# EAGLE board Sensor Board@cc5a5f78792f40558ec8fd108debedc7 (EAGLE 6.4)
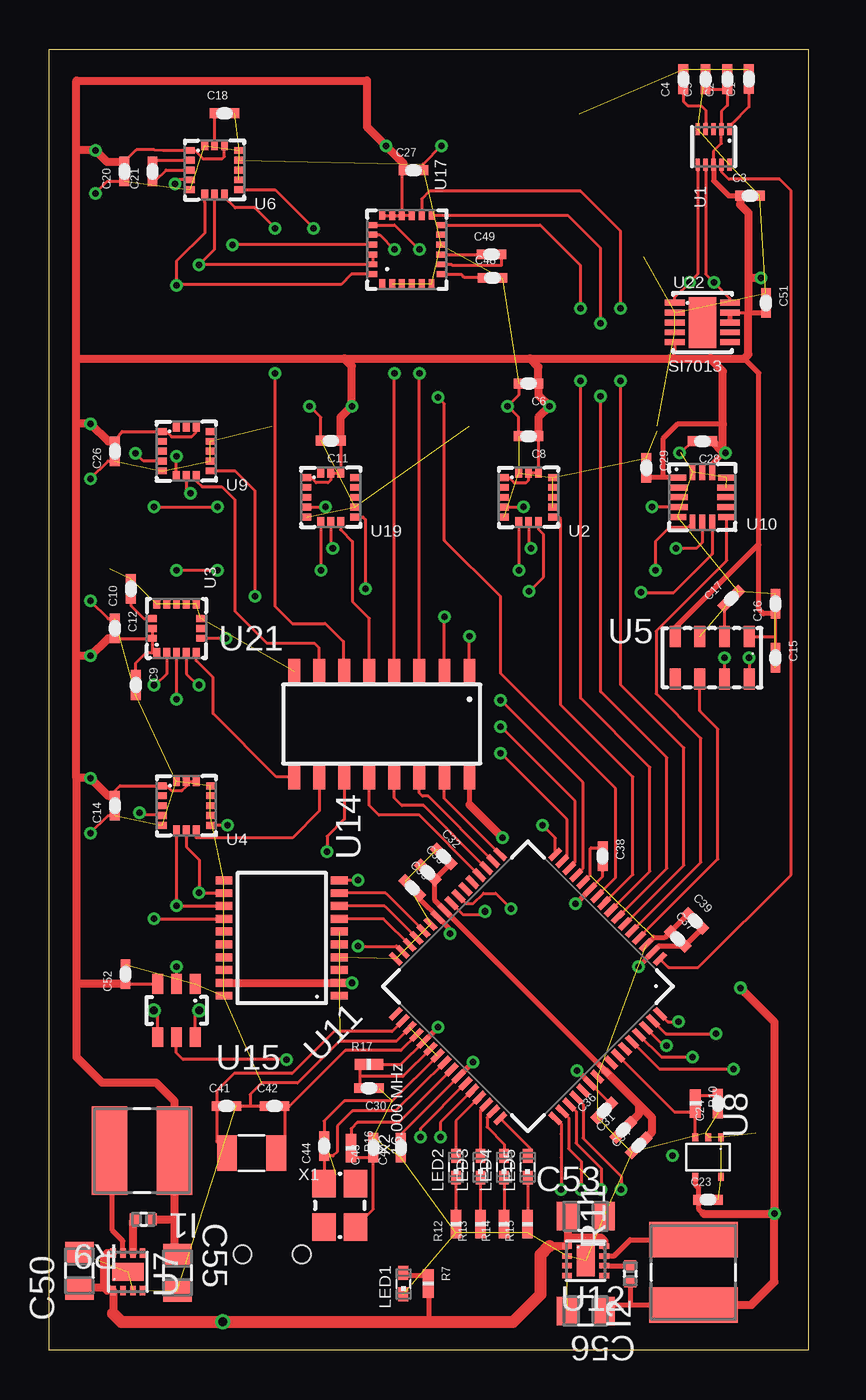
[diagram p0: board, top side]
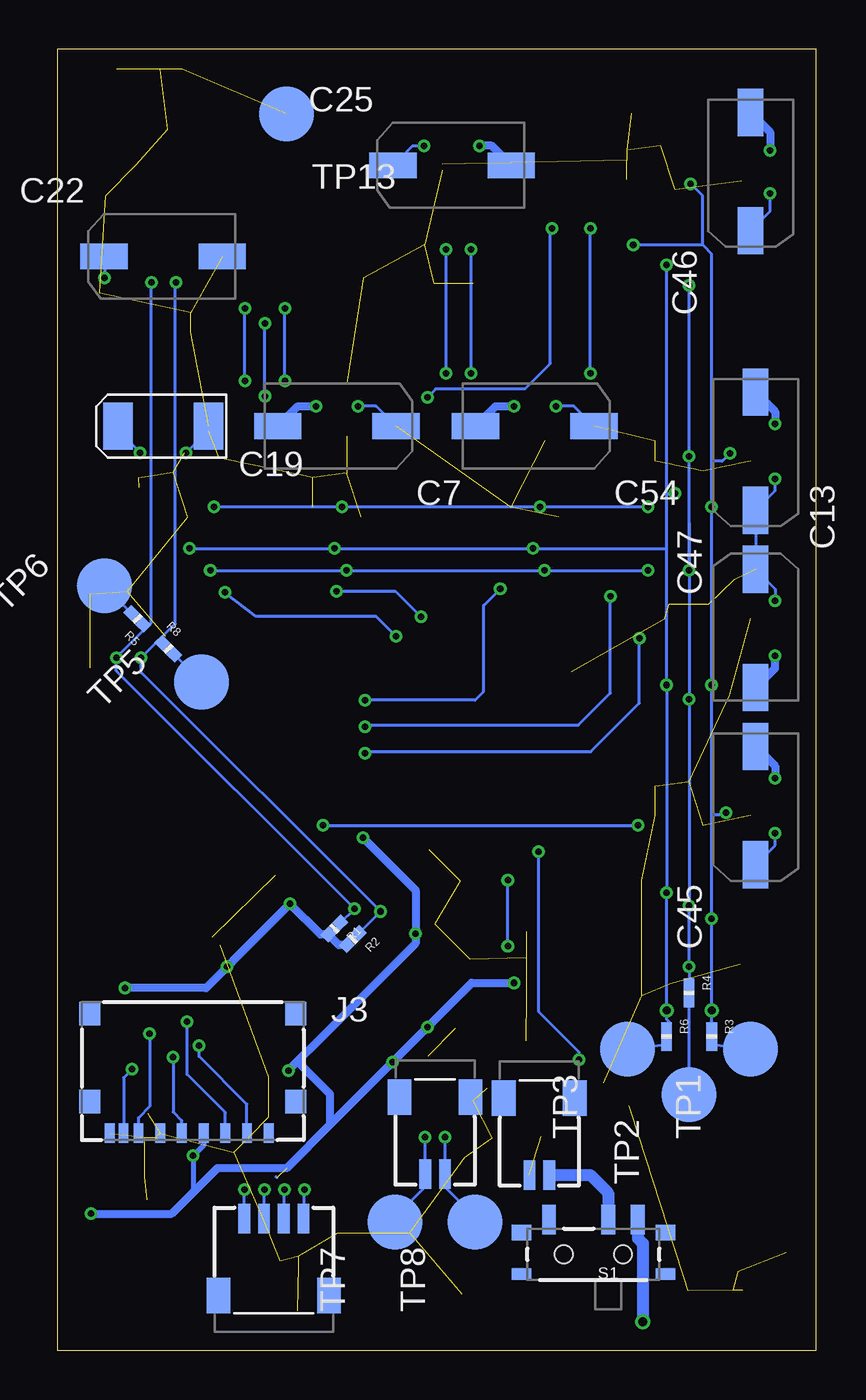
[diagram p1: board, bottom side, seen from below]

Size 38.5 x 66 mm. Coordinates in mm from the lower left corner, seen from the top.
Outline: 38.5,0 0,0 0,66 38.5,66 38.5,0
Copper layers (1*2*15*16): Top 0.035mm / dielectric 0.2mm / Route2 0.0175mm / dielectric 1.1mm / Route15 0.0175mm / dielectric 0.2mm / Bottom 0.035mm
Design rules "SeeedStudio_DRU_no_angle_20130527": minimum track width 6mil, minimum drill 12mil, track to track 6mil, track to pad 6mil, pad to pad 6mil, via to via 6mil, smd to smd 0mil, copper to edge 10mil, drill to drill 10mil, minimum pad ring 6mil, minimum via ring 6mil, stop-mask expansion 2mil, vias tented up to drill 25mil, thermal gap 10mil

## Footprints (pad centres in the part's own frame; a part is rotated, then mirrored left to right if it is on the bottom)
C0402 = smd 0.5 x 0.5: 1 -0.5,0; 2 0.5,0
4.3X7.3SMD = smd 2.4 x 1.3: P$1 -3,0; P$2 3,0
EIA6032 = smd 1.5 x 2.4: P$1 -2.3,0; P$2 2.3,0
0805 = smd 1.118 x 1.448: 1 -0.914,0; 2 0.914,0
SDR0403 = smd 1.803 x 4.496: 1 -1.651,0; 2 1.651,0
501568-0207 = smd 0.6 x 1.5: P$1 -0.5,3.9; P$2 0.5,3.9 | smd 1.2 x 1.8: P$5 -1.8,0; P$6 1.8,0
SD-105027-1001 = smd 0.5 x 1: P$1 3.85,-6.66; P$2 2.75,-6.66; P$3 1.65,-6.66; P$4 0.55,-6.66; P$5 -0.55,-6.66; P$6 -1.65,-6.66; P$7 -2.75,-6.66; P$8 -3.51,-6.66; P$9 -4.21,-6.66 | smd 1.05 x 1.2: P$10 -5.225,-0.6; P$11 -5.225,-5.05; P$12 5.225,-5.05; P$13 5.225,-0.6
501568-0407 = smd 0.6 x 1.5: P$1 -1.5,3.9; P$2 -0.5,3.9; P$3 0.5,3.9; P$4 1.5,3.9 | smd 1.2 x 1.8: P$5 -2.8,0; P$6 2.8,0
LED_0402 = smd 0.7 x 0.5: A 0.55,0; C -0.55,0
R0402 = smd 0.6 x 0.55: 1 -0.425,0; 2 0.425,0
0402 = smd 0.559 x 0.61: 1 -0.406,0; 2 0.406,0
SWITCH-SPST-SMD-A = smd 0.7 x 1.5: 1 -2.25,-1.75; 2 -0.75,-1.75; 3 2.25,-1.75 | smd 1 x 0.6: GND1 -3.65,1; GND3 3.65,1 | smd 1 x 0.8: GND2 -3.65,-1.1; GND4 3.65,-1.1 | hole 0.9: -1.5,0; 1.5,0
TESTPAD(ROUND) = smd 2.794 x 2.794: P$1 0,0
DFN-10(2X2) = smd 0.6 x 0.225: P$1 -0.9,0.8; P$2 -0.9,0.4; P$3 -0.9,0; P$4 -0.9,-0.4; P$5 -0.9,-0.8; P$6 0.9,-0.8; P$7 0.9,-0.4; P$8 0.9,0; P$9 0.9,0.4; P$10 0.9,0.8
LGA-16(3X3) = smd 0.45 x 0.345: P$1 -1.225,1; P$2 -1.225,0.5; P$3 -1.225,0; P$4 -1.225,-0.5; P$5 -1.225,-1; P$9 1.225,-1; P$10 1.225,-0.5; P$11 1.225,0; P$12 1.225,0.5; P$13 1.225,1 | smd 0.345 x 0.45: P$6 -0.5,-1.225; P$7 0,-1.225; P$8 0.5,-1.225; P$14 0.5,1.225; P$15 0,1.225; P$16 -0.5,1.225
LGA-8(5X3) = smd 0.55 x 1.05: P$1 -1.875,-1.075; P$2 -0.625,-1.075; P$3 0.625,-1.075; P$4 1.875,-1.075; P$5 1.875,1.075; P$6 0.625,1.075; P$7 -0.625,1.075; P$8 -1.875,1.075
S-PWSON-N8 = smd 0.5 x 0.28: 1 -0.95,0.75; 2 -0.95,0.25; 3 -0.95,-0.25; 4 -0.95,-0.75; 5 0.95,-0.75; 6 0.95,-0.25; 7 0.95,0.25; 8 0.95,0.75 | smd 0.9 x 1.6: 9 0,0
SOT323-5L = smd 0.4 x 0.3: P$1 1,-0.65; P$2 1,0; P$3 1,0.65; P$4 -1,0.65; P$5 -1,-0.65
LGA-16(3X3.25) = smd 0.865 x 0.3: P$1 -1.242,1; P$5 -1.242,-1; P$9 1.242,-1; P$13 1.242,1 | smd 0.925 x 0.3: P$2 -1.212,0.5; P$3 -1.212,0; P$4 -1.212,-0.5; P$10 1.212,-0.5; P$11 1.212,0; P$12 1.212,0.5 | smd 0.3 x 0.8: P$6 -0.5,-1.275; P$7 0,-1.275; P$8 0.5,-1.275; P$14 0.5,1.275; P$15 0,1.275; P$16 -0.5,1.275
S-PQFP-G64 = smd 0.75 x 0.27: P$1 -5.725,3.75; P$2 -5.725,3.25; P$3 -5.725,2.75; P$4 -5.725,2.25; P$5 -5.725,1.75; P$6 -5.725,1.25; P$7 -5.725,0.75; P$8 -5.725,0.25; P$9 -5.725,-0.25; P$10 -5.725,-0.75; P$11 -5.725,-1.25; P$12 -5.725,-1.75; P$13 -5.725,-2.25; P$14 -5.725,-2.75; P$15 -5.725,-3.25; P$16 -5.725,-3.75; P$33 5.725,-3.75; P$34 5.725,-3.25; P$35 5.725,-2.75; P$36 5.725,-2.25; P$37 5.725,-1.75; P$38 5.725,-1.25; P$39 5.725,-0.75; P$40 5.725,-0.25; P$41 5.725,0.25; P$42 5.725,0.75; P$43 5.725,1.25; P$44 5.725,1.75; P$45 5.725,2.25; P$46 5.725,2.75; P$47 5.725,3.25; P$48 5.725,3.75 | smd 0.27 x 0.75: P$17 -3.75,-5.725; P$18 -3.25,-5.725; P$19 -2.75,-5.725; P$20 -2.25,-5.725; P$21 -1.75,-5.725; P$22 -1.25,-5.725; P$23 -0.75,-5.725; P$24 -0.25,-5.725; P$25 0.25,-5.725; P$26 0.75,-5.725; P$27 1.25,-5.725; P$28 1.75,-5.725; P$29 2.25,-5.725; P$30 2.75,-5.725; P$31 3.25,-5.725; P$32 3.75,-5.725; P$49 3.75,5.725; P$50 3.25,5.725; P$51 2.75,5.725; P$52 2.25,5.725; P$53 1.75,5.725; P$54 1.25,5.725; P$55 0.75,5.725; P$56 0.25,5.725; P$57 -0.25,5.725; P$58 -0.75,5.725; P$59 -1.25,5.725; P$60 -1.75,5.725; P$61 -2.25,5.725; P$62 -2.75,5.725; P$63 -3.25,5.725; P$64 -3.75,5.725
TSSOP-(PW)-20 = smd 0.4 x 0.85: P$1 -2.925,-2.925; P$2 -2.275,-2.925; P$3 -1.625,-2.925; P$4 -0.975,-2.925; P$5 -0.325,-2.925; P$6 0.325,-2.925; P$7 0.975,-2.925; P$8 1.625,-2.925; P$9 2.275,-2.925; P$10 2.925,-2.925; P$11 2.925,2.925; P$12 2.275,2.925; P$13 1.625,2.925; P$14 0.975,2.925; P$15 0.325,2.925; P$16 -0.325,2.925; P$17 -0.975,2.925; P$18 -1.625,2.925; P$19 -2.275,2.925; P$20 -2.925,2.925
SOT23-6 = smd 0.55 x 1: P$1 0.95,1.35; P$2 0,1.35; P$3 -0.95,1.35; P$4 -0.95,-1.35; P$5 0,-1.35; P$6 0.95,-1.35
LGA-24(4X4) = smd 0.432 x 0.3: P$1 -1.725,1.25; P$6 -1.725,-1.25; P$13 1.725,-1.25; P$18 1.725,1.25 | smd 0.45 x 0.3: P$2 -1.725,0.75; P$3 -1.725,0.25; P$4 -1.725,-0.25; P$5 -1.725,-0.75; P$14 1.725,-0.75; P$15 1.725,-0.25; P$16 1.725,0.25; P$17 1.725,0.75 | smd 0.3 x 0.432: P$7 -1.25,-1.725; P$12 1.25,-1.725; P$19 1.25,1.725; P$24 -1.25,1.725 | smd 0.3 x 0.45: P$8 -0.75,-1.725; P$9 -0.25,-1.725; P$10 0.25,-1.725; P$11 0.75,-1.725; P$20 0.75,1.725; P$21 0.25,1.725; P$22 -0.25,1.725; P$23 -0.75,1.725
SOIC-16 = smd 0.6 x 1.27: P$1 -4.445,-2.675; P$2 -3.175,-2.675; P$3 -1.905,-2.675; P$4 -0.635,-2.675; P$5 0.635,-2.675; P$6 1.905,-2.675; P$7 3.175,-2.675; P$8 4.445,-2.675; P$9 4.445,2.675; P$10 3.175,2.675; P$11 1.905,2.675; P$12 0.635,2.675; P$13 -0.635,2.675; P$14 -1.905,2.675; P$15 -3.175,2.675; P$16 -4.445,2.675
DFN-10(3X3) = smd 1 x 0.3: P$1 -1.4,1; P$2 -1.4,0.5; P$3 -1.4,0; P$4 -1.4,-0.5; P$5 -1.4,-1; P$6 1.4,-1; P$7 1.4,-0.5; P$8 1.4,0; P$9 1.4,0.5; P$10 1.4,1 | smd 1.4 x 2.6: P$11 0,0
2-SMD(3.2X1.5) = smd 1 x 1.8: P$1 -1.25,0; P$2 1.25,0
4-SMD(3.2X2.5) = smd 1.4 x 1.2: P$1 -1.1,-0.8; P$2 1.1,-0.8; P$3 1.1,0.8; P$4 -1.1,0.8

## Placement (x,y rotation side)
C1  100nF  [C0402]  35.48,64.49 90 top
C2  1uF  [C0402]  34.39,64.48 90 top
C3  100nF  [C0402]  35.53,58.56 0 top
C4  100nF  [C0402]  32.16,64.48 90 top
C5  100nF  [C0402]  33.28,64.48 90 top
C6  0.1uF  [C0402]  24.31,49.04 180 top
C7  10uF  [4.3X7.3SMD]  24.31,46.88 0 bottom
C8  100nF  [C0402]  24.31,46.37 180 top
C9  100nF  [C0402]  4.39,33.75 270 top
C10  10nF  [C0402]  4.14,38.62 90 top
C11  1uF  [C0402]  14.27,46.14 180 top
C12  10uF  [C0402]  3.33,36.62 270 top
C13  100nF  [4.3X7.3SMD]  3.07,36.62 90 bottom
C14  100nF  [C0402]  3.33,27.63 90 top
C15  100nF  [C0402]  36.83,35.12 270 top
C16  10uF  [C0402]  36.83,37.86 90 top
C17  100nF  [C0402]  34.59,38.14 45 top
C18  4.7uF  [C0402]  8.89,62.76 0 top
C19  1uF  [EIA6032]  33.12,46.88 0 bottom
C20  100nF  [C0402]  3.81,59.8 90 top
C21  0.22uF  [C0402]  5.23,59.8 90 top
C22  10uF  [4.3X7.3SMD]  33.12,55.49 180 bottom
C23  0.1uF  [C0402]  33.42,7.64 0 top
C24  1uF  [C0402]  33.9,12.51 90 top
C25  10uF  [4.3X7.3SMD]  18.46,60.11 180 bottom
C26  100nF  [C0402]  3.33,45.61 90 top
C27  100nF  [C0402]  18.46,59.86 0 top
C28  0.1uF  [C0402]  33.12,46.12 180 top
C29  0.1uF  [C0402]  30.28,44.77 270 top
C30  0.1uF  [C0402]  16.2,13.29 180 top
C31  0.1uF  [C0402]  29.1,11.18 45 top
C32  0.1uF  [C0402]  20,25.05 315 top
C33  2.2uF  [C0402]  19.2,24.25 315 top
C34  1.0uF  [C0402]  29.89,10.39 45 top
C35  0.01uF  [C0402]  18.41,23.46 315 top
C36  0.1uF  [C0402]  28.15,12.16 45 top
C37  0.01uF  [C0402]  31.87,20.87 315 top
C38  0.1uF  [C0402]  28.07,25.06 270 top
C39  0.01uF  [C0402]  32.75,21.78 315 top
C40  1.0uF  [C0402]  17.83,10.28 90 top
C41  24pF  [C0402]  8.99,12.39 0 top
C42  24pF  [C0402]  11.43,12.39 0 top
C43  10pF  [C0402]  16.43,10.28 90 top
C44  10pF  [C0402]  13.94,10.35 90 top
C45  10uF  [4.3X7.3SMD]  3.07,27.63 270 bottom
C46  10uF  [4.3X7.3SMD]  3.33,59.8 270 bottom
C47  10uF  [4.3X7.3SMD]  3.07,45.61 270 bottom
C48  4.7uF  [C0402]  22.48,54.4 0 top
C49  0.22uF  [C0402]  22.43,55.59 0 top
C50  GRM21BR60J106ME19L  [0805]  1.52,4.03 90 top
C51  [C0402]  36.35,53.13 270 top
C52  0.1uF  [C0402]  3.86,19.09 90 top
C53  GRM21BR60J106ME19L  [0805]  27.2,6.8 0 top
C54  10uF  [4.3X7.3SMD]  14.27,46.88 0 bottom
C55  C2012X5R0J226M  [0805]  6.5,3.93 270 top
C56  C2012X5R0J226M  [0805]  27.2,2 180 top
I1  SDR0403-1R0ML  [SDR0403]  4.7,10.13 180 top
I2  SDR0403-1R0ML  [SDR0403]  32.66,3.95 90 top
J1  501568-0207  [501568-0207]  14.04,12.79 180 bottom
J2  501568-0207  [501568-0207]  19.33,12.84 180 bottom
J3  SD-105027-101  [SD-105027-1001]  31.62,17.67 0 bottom
J4  501568-0407  [501568-0407]  27.51,2.79 0 bottom
LED1  Green  [LED_0402]  17.96,3.38 90 top
LED2  Red  [LED_0402]  20.62,9.31 90 top
LED3  Red  [LED_0402]  21.87,9.31 90 top
LED4  Red  [LED_0402]  23.06,9.31 90 top
LED5  Red  [LED_0402]  24.26,9.31 90 top
R1  10k  [R0402]  24.44,21.39 225 bottom
R2  10k  [R0402]  23.5,20.86 225 bottom
R3  0  [R0402]  5.31,15.92 270 bottom
R4  0  [R0402]  6.45,18.13 270 bottom
R5  0  [R0402]  34.43,37.11 135 bottom
R6  0  [R0402]  7.59,15.92 270 bottom
R7  10k  [R0402]  19.23,3.38 270 top
R8  0  [R0402]  32.86,35.59 315 bottom
R9  CRCW0402178KFKED  [0402]  4.77,6.65 180 top
R10  200  [R0402]  32.75,12.51 270 top
R11  CRCW0402178KFKED  [0402]  29.46,3.88 90 top
R12  10k  [R0402]  20.62,6.39 90 top
R13  10k  [R0402]  21.87,6.39 90 top
R14  10k  [R0402]  23.06,6.39 90 top
R15  10k  [R0402]  24.26,6.39 90 top
R16  0  [R0402]  15.3,10.25 270 top
R17  10k  [R0402]  16.2,14.49 0 top
S1  Power  [SWITCH-SPST-SMD-A]  11.3,4.87 180 bottom
TP1  TESTPAD(ROUND)  [TESTPAD(ROUND)]  3.33,15.27 270 bottom
TP2  TESTPAD(ROUND)  [TESTPAD(ROUND)]  6.45,12.97 270 bottom
TP3  TESTPAD(ROUND)  [TESTPAD(ROUND)]  9.57,15.27 270 bottom
TP5  TESTPAD(ROUND)  [TESTPAD(ROUND)]  31.17,33.9 225 bottom
TP6  TESTPAD(ROUND)  [TESTPAD(ROUND)]  36.1,38.78 225 bottom
TP7  TESTPAD(ROUND)  [TESTPAD(ROUND)]  21.36,6.49 270 bottom
TP8  TESTPAD(ROUND)  [TESTPAD(ROUND)]  17.3,6.49 270 bottom
TP13  TESTPAD(ROUND)  [TESTPAD(ROUND)]  26.87,62.73 0 bottom
U1  MAG3110  [DFN-10(2X2)]  33.69,61.05 270 top
U2  H3LIS331DLTR  [LGA-16(3X3)]  24.31,43.27 0 top
U3  L3GD20H  [LGA-16(3X3)]  6.45,36.62 90 top
U4  LPS331AP  [LGA-16(3X3)]  6.95,27.63 0 top
U5  MPL3115A2  [LGA-8(5X3)]  33.61,35.13 180 top
U6  LSM303D  [LGA-16(3X3)]  8.38,59.87 0 top
U7  TPS62082DSGR  [S-PWSON-N8]  3.99,3.98 90 top
U8  STLM20  [SOT323-5L]  33.42,9.8 90 top
U9  LIS3DH  [LGA-16(3X3)]  6.95,45.61 0 top
U10  ADXL362  [LGA-16(3X3.25)]  33.12,43.27 0 top
U11  TM4C1233H6PM  [S-PQFP-G64]  24.27,18.46 225 top
U12  TPS62082DSGR  [S-PWSON-N8]  27.2,4.54 0 top
U14  TXB0108  [TSSOP-(PW)-20]  11.78,20.91 90 top
U15  ADT7301  [SOT23-6]  6.45,17.24 0 top
U17  LSM9DS0  [LGA-24(4X4)]  18.13,55.84 90 top
U19  MAX21000  [LGA-16(3X3)]  14.27,43.27 0 top
U21  SN74HC42  [SOIC-16]  16.86,31.77 180 top
U22  SI7013  [DFN-10(3X3)]  33.12,52.14 0 top
X1  32.768 kHz  [2-SMD(3.2X1.5)]  10.26,9.99 0 top
X2  16.000 MHz  [4-SMD(3.2X2.5)]  14.74,7.35 90 top

## Library data of the parts
C1-C18 C20-C49 C51 C52 C54 R1-R8 R10 R12-R17 TP1-TP3 TP7 TP8 TP13 = Kas-Passives
C19 = SparkFun-Passives
C50 C53 = Power Regulator; CAP: 1.0E-5; ESR: 0.0030; IRMS: 0.0; MANUFACTURER_NAME: MuRata; MANUFACTURER_PART_NUMBER: GRM21BR60J106ME19L; VDC: 6.3; VENDOR: MuRata
C55 C56 = Power Regulator; CAP: 2.2E-5; ESR: 0.0018; IRMS: 0.0; MANUFACTURER_NAME: TDK; MANUFACTURER_PART_NUMBER: C2012X5R0J226M; VDC: 6.3; VENDOR: TDK
I1 I2 = Power Regulator; DCR: 0.033; IDC: 3.8; L: 1.0E-6; MANUFACTURER_NAME: Bourns; MANUFACTURER_PART_NUMBER: SDR0403-1R0ML; VENDOR: Bourns
J1-J4 TP5 TP6 = Kas-Connectors
LED1 = Kas-Diodes-LEDs; MANUFACTURER: Knightbright; PART_NUMBER: APG1005CGC-T
LED2-LED5 = Kas-Diodes-LEDs; MANUFACTURER: Knightbright; PART_NUMBER: APG1005SEC/E-T
R9 R11 = Power Regulator; MANUFACTURER_NAME: Vishay-Dale; MANUFACTURER_PART_NUMBER: CRCW0402178KFKED; POWER: 0.063; RESISTANCE: 178000.0; TOLERANCE: 1.0; VENDOR: Vishay-Dale
S1 = SparkFun-Electromechanical
U1-U6 U8-U10 U15 U17 U19 U22 = Kas-Sensors
U7 U12 = Power Regulator; DATASHEETURL: http://www.ti.com/product/tps62082; FREQUENCY: 3100000.0; IMAX: 1.2; MANUFACTURER_NAME: Texas Instruments; MANUFACTURER_PART_NUMBER: TPS62082DSGR; MKTG_PACKAGE: TPS62082; NSID: TPS62082DSG; PACKAGE: TPS62082; VENDOR: Texas Instruments
U11 = Kas-Microcontroller
U14 U21 = Kas-Buffers & Level Shifters
X1 X2 = Kas-Crystal

## Nets
1.2V: C31.2 C32.2 C33.2 C34.2 U11.P$25 U11.P$56
3.3V-A: C2.1 C3.1 C5.1 C6.1 C7.P$1 C8.1 C9.1 C11.1 C12.2 C13.P$1 C14.2 C15.1 C16.1 C19.P$1 C20.2 C22.P$2 C25.P$1 C26.2 C27.1 C28.1 C29.2 C45.P$1 C46.P$1 C47.P$1 C51.2 C52.1 C54.P$1 C55.1 I1.1 R9.1 U1.P$2 U1.P$8 U2.P$1 U2.P$14 U2.P$15 U3.P$1 U3.P$15 U3.P$16 U4.P$1 U4.P$14 U4.P$15 U5.P$1 U5.P$4 U6.P$1 U6.P$14 U9.P$1 U9.P$14 U10.P$1 U10.P$14 U15.P$3 U17.P$15 U17.P$16 U17.P$17 U17.P$18 U19.P$1 U19.P$14 U19.P$15 U22.P$5 U22.P$8 U22.P$9
3.3V-B: C23.1 C35.2 C36.2 C37.2 C38.2 C39.2 C40.2 C56.1 I2.1 J3.P$4 R1.2 R2.2 R11.1 R17.2 U8.P$4 U11.P$2 U11.P$11 U11.P$26 U11.P$37 U11.P$42 U11.P$54 U14.P$2 U14.P$19 U21.P$16
!CS-ADT7301: U15.P$5 U21.P$11
!CS-ADXL362: U10.P$8 U21.P$1
!CS-H3LIS331DLTR: U2.P$8 U21.P$2
!CS-LIS3DH: U9.P$8 U21.P$7
!CS-LPS331: U4.P$8 U21.P$10
!CS-LS3GD20: U3.P$5 U21.P$9
!CS-LSM9D30-G: U17.P$19 U21.P$3
!CS-LSM9DS0-XM: U17.P$20 U21.P$4
!CS-LSM303: U6.P$8 U21.P$6
!CS-MAX21000: U19.P$8 U21.P$5
ANALOG-OUT-STLM20: R10.2 U8.P$3 U11.P$58
GND: C1.2 C2.2 C3.2 C4.2 C5.2 C6.2 C7.P$2 C8.2 C9.2 C10.2 C11.2 C12.1 C13.P$2 C14.1 C15.2 C16.2 C17.2 C18.2 C19.P$2 C20.1 C22.P$1 C23.2 C24.1 C25.P$2 C26.1 C27.2 C28.2 C29.1 C30.1 C31.1 C32.1 C33.1 C34.1 C35.1 C36.1 C37.1 C38.1 C39.1 C40.1 C41.2 C42.1 C43.2 C44.2 C45.P$2 C46.P$2 C47.P$2 C48.2 C50.2 C51.1 C52.2 C53.2 C54.P$2 C55.2 C56.2 J1.P$2 J3.P$6 J3.P$9 LED1.C R12.1 R13.1 R14.1 R15.1 TP13.P$1 U1.P$5 U1.P$10 U2.P$5 U2.P$10 U2.P$12 U2.P$13 U2.P$16 U3.P$8 U3.P$9 U3.P$10 U3.P$11 U3.P$12 U3.P$13 U4.P$5 U4.P$10 U4.P$11 U4.P$12 U4.P$13 U4.P$16 U5.P$3 U6.P$5 U6.P$10 U6.P$12 U6.P$13 U6.P$16 U7.2 U7.3 U7.9 U8.P$1 U8.P$2 U8.P$5 U9.P$5 U9.P$10 U9.P$12 U10.P$5 U10.P$12 U10.P$13 U10.P$16 U11.P$3 U11.P$12 U11.P$27 U11.P$32 U11.P$35 U11.P$39 U11.P$55 U12.2 U12.3 U12.9 U14.P$1 U14.P$3 U14.P$4 U14.P$5 U14.P$6 U14.P$11 U14.P$15 U14.P$16 U14.P$17 U14.P$18 U14.P$20 U15.P$1 U17.P$2 U17.P$3 U17.P$4 U17.P$5 U17.P$6 U17.P$10 U19.P$5 U19.P$10 U21.P$8 U22.P$2 U22.P$3 U22.P$4
IND-LED-1: LED2.A U11.P$45
IND-LED-2: LED3.A U11.P$46
IND-LED-3: LED4.A U11.P$47
IND-LED-4: LED5.A U11.P$48
INT1-MAG3110: U1.P$9 U11.P$1
INT1-MPL311: U5.P$6 U11.P$4
INT2-ADXL362: U10.P$9 U11.P$5
INT2-H3LIS331: U2.P$9 U11.P$9
INT2-L3GD: U3.P$6 U11.P$15
INT2-LIS3DH: U9.P$9 U11.P$14
INT2-LPS331: U4.P$9 U11.P$16
INT2-LSM303: U6.P$9 U11.P$10
INT2-MAX21000: U11.P$13 U19.P$9
LSM9D-DRGY-G: U11.P$8 U17.P$12
LSM9D-INT1-XM: U11.P$7 U17.P$13
LSM9D-INT2-XM: U11.P$6 U17.P$14
MISO-A: U11.P$28 U14.P$9
MISO-B: R6.1 U2.P$7 U3.P$4 U4.P$7 U6.P$7 U9.P$7 U10.P$7 U14.P$12 U15.P$6 U17.P$22 U17.P$23 U19.P$7
MOSI-A: U11.P$29 U14.P$8
MOSI-B: R4.1 U2.P$6 U3.P$3 U4.P$6 U6.P$6 U9.P$6 U10.P$6 U14.P$13 U15.P$2 U17.P$24 U19.P$6
N$1: C1.1 U1.P$1
N$2: J1.P$1 S1.2
N$3: C4.1 U1.P$4
N$4: C10.1 U3.P$14
N$5: C17.1 U5.P$2
N$6: C18.1 U6.P$15
N$7: C21.2 U6.P$2
N$8: C48.1 U17.P$7
N$9: C24.2 R10.1
N$10: C30.2 R17.1 U11.P$38
N$11: C42.2 U11.P$36 X1.P$2
N$12: C41.1 U11.P$34 X1.P$1
N$13: I1.2 U7.7
N$14: C43.1 R16.2 X2.P$1
N$15: C21.1 U6.P$3
N$16: C44.1 U11.P$40 X2.P$3
N$17: R16.1 U11.P$41
N$18: LED5.C R15.2
N$21: C49.2 U17.P$8
N$22: C49.1 U17.P$9
N$23: R9.2 U7.6
N$24: R5.2 TP6.P$1
N$26: R8.2 TP5.P$1
N$27: LED1.A R7.1
N$29: LED4.C R14.2
N$31: LED3.C R13.2
N$32: R3.2 TP1.P$1
N$33: R4.2 TP2.P$1
N$34: R6.2 TP3.P$1
N$35: LED2.C R12.2
N$36: I2.2 U12.7
N$37: R11.2 U12.6
POWER-IN: C50.1 C53.1 R7.2 S1.1 U7.1 U7.8 U12.1 U12.8
SCL-0: R1.1 R5.1 U1.P$7 U5.P$8 U11.P$23 U22.P$10
SCLK-A: U11.P$30 U14.P$7
SCLK-B: R3.1 U2.P$4 U3.P$2 U4.P$4 U6.P$4 U9.P$4 U10.P$4 U14.P$14 U15.P$4 U17.P$21 U19.P$4
SD-CARD-INSERT: J3.P$8 U11.P$60
SD-CS: J3.P$2 U11.P$62
SD-MISO: J3.P$7 U11.P$63
SD-MOSI: J3.P$3 U11.P$64
SD-SCLK: J3.P$5 U11.P$61
SDA-0: R2.1 R8.1 U1.P$6 U5.P$7 U11.P$24 U22.P$1
SPI-ADDR0: U11.P$17 U21.P$15
SPI-ADDR1: U11.P$18 U21.P$14
SPI-ADDR2: U11.P$19 U21.P$13
SPI-ADDR3: U11.P$20 U21.P$12
SPI-ENABLE: U11.P$31 U14.P$10
SWCLK: J4.P$1 U11.P$52
SWDIO: J4.P$2 U11.P$51
SWO: J4.P$4 U11.P$49
TDI: J4.P$3 U11.P$50
U6RX: J2.P$1 TP8.P$1 U11.P$43
U6TX: J2.P$2 TP7.P$1 U11.P$44

## Tracks (layer width: path | path; a pad name or v marks a point on that pad's centre or on a via)
1.2V
  Top 0.152: U11.P$56 28.14,14.19 28.16,14.19 | 30.24,10.88 C34.2
  Top 0.254: C32.2 C33.2 19.55,22.82 U11.P$25 U11.P$56
  Top 0.406: 28.16,14.19 29.91,12.45 | 29.91,12.45 30.55,11.8 30.55,11.06 C34.2 | C31.2 29.91,11.99 29.91,12.45
3.3V-A  (via drill 0.33)
  Top 0.152: U9.P$14 7.45,46.58 7.21,46.35 6.2,46.35 5.94,46.61 U9.P$1 3.68,46.61 C26.2 2.98,46.11 | C8.1 U2.P$14 U2.P$15 24.31,44.14 24.18,44.01 23.57,44.01 23.31,44.27 U2.P$1 | C11.1 U19.P$14 U19.P$15 14.27,44.14 14.15,44.01 13.54,44.01 13.27,44.27 U19.P$1 | U3.P$15 U3.P$16 | U3.P$16 C12.2 2.98,36.12 | C9.1 4.39,34.87 4.92,35.39 U3.P$1 5.23,35.39 U3.P$16 | U1.P$8 33.68,60.82 34.09,61.23 U1.P$2 34.09,62.86 34.39,63.16 C2.1 C5.1 | U4.P$1 5.48,28.63 | U15.P$3 C52.1 | U17.P$16 U17.P$17 U17.P$18 | U17.P$15 U17.P$16 | U22.P$9 35.46,52.63 | U17.P$16 17.88,59.78 C27.1 17.96,60.21 | U10.P$1 | v34.29,45.53 34.2,45.53 34.16,45.57 | 33.62,44.95 U10.P$14 | U4.P$15 U4.P$14 | U4.P$15 | U4.P$15 6.95,28.61 6.73,28.39 6.2,28.39 5.93,28.63 U4.P$1 | C14.2 3.33,28.38 3.57,28.63 U4.P$1 | C20.2 4.42,60.9 5.33,60.9 5.77,60.87 U6.P$1 7.38,60.87 7.8,60.44 8.76,60.44 8.88,60.56 U6.P$14 | C16.1 36.83,36.21 | 36.83,36.21 C15.1 | U5.P$1 36.82,36.21 36.83,36.21 | U22.P$5 31.72,50.58 31.44,50.31 | 31.11,44.45 31.29,44.27
  Top 0.254: U1.P$8 33.69,59.33 34.46,58.56 C3.1 | 35.46,52.63 C51.2 | U22.P$9 U22.P$8 | U10.P$1 31.29,44.27 C29.2 | 34.2,45.53 33.62,44.95 | C16.1 36.21,37.36 35.99,37.58 35.99,40.86 | 35.99,40.86 35.99,49.57 35.25,50.31 | U5.P$4 31.74,36.66 35.94,40.86 35.99,40.86 | 34.16,46.98 31.85,46.98 31.11,46.24 31.11,44.45
  Top 0.406: C11.1 14.77,47.33 v15.34,47.9 15.34,49.93 14.96,50.31 | 35.46,54.4 35.46,52.63 | v36.09,54.4 35.46,54.4 | C28.1 34.16,45.57 34.16,46.98 34.16,49.67 33.53,50.31 | 2.98,46.11 v2.08,47.01 1.37,47.01 | 2.98,36.12 v2.08,35.22 1.37,35.22 | 1.37,29.02 1.37,35.22 | 1.37,35.22 1.37,47.01 | 1.37,47.01 1.37,50.31 | 1.37,50.31 1.37,60.87 | 1.37,60.87 1.37,64.41 16.1,64.41 16.1,62.07 v17.07,61.1 17.96,60.21 | 1.37,60.87 v2.34,60.87 2.91,60.3 C20.2 | 1.37,29.02 v2.08,29.02 2.98,28.13 C14.2 | C8.1 24.81,47.33 v25.37,47.9 24.81,48.46 C6.1 24.81,49.88 24.38,50.31 | 1.37,50.31 14.96,50.31 | 14.96,50.31 24.38,50.31 | 24.38,50.31 31.44,50.31 33.53,50.31 | 33.53,50.31 35.25,50.31 35.46,50.51 35.46,52.63 | 1.37,29.02 1.37,18.58 | C52.1 1.37,18.58 | C3.1 35.03,58.12 35.46,57.7 35.46,54.4 | 1.37,18.58 1.37,14.88 2.67,13.58 5.41,13.58 6.35,12.64 I1.1 6.35,6.65 | 6.35,6.65 6.35,4.99 C55.1 | R9.1 6.35,6.65
  Bottom 0.152: C22.P$2 36.09,55.49 v36.09,54.4 | C19.P$1 35.42,46.66 v34.29,45.53
  Bottom 0.406: C54.P$1 16.26,47.9 v15.34,47.9 | v25.37,47.9 26.29,47.9 C7.P$1 | v2.08,47.01 2.08,47.62 C47.P$1 | C45.P$1 2.08,29.64 v2.08,29.02 | v2.08,35.22 2.08,34.61 C13.P$1 | v2.34,60.87 2.34,61.8 C46.P$1 | v17.07,61.1 16.45,61.1 C25.P$1
3.3V-B  (via drill 0.33)  (1 unrouted)
  Top 0.152: U11.P$37 17.83,14.49 R17.2 | U11.P$11 28.07,24.02 C38.2 | U11.P$42 17.83,10.96 C40.2 | U11.P$54 28.44,12.51 C36.2 | 32.77,7.79 C23.1 | C56.1 28.42,2.3 | v36.78,6.93 36.6,6.93 | v15.34,18.63 v15.34,18.64
  Top 0.254: C35.2 18.86,22.8 U11.P$26 20.32,21.35 v20.32,21.14 | v26.69,22.65 U11.P$11 | v29.88,19.45 U11.P$2 30.93,20.52 C37.2 33.11,21.4 C39.2 | v26.77,14.19 U11.P$54 | 28.42,2.3 29.46,2.3 | 29.46,2.3 I2.1 | R11.1 29.46,2.3 | 33.17,6.93 32.92,7.18 C23.1 32.92,8.25 32.77,8.4 U8.P$4 | U21.P$16 21.31,27.68 | U11.P$37 v19.72,16.38 | U11.P$42 v21.48,14.61 v21.48,14.62
  Top 0.406: U14.P$19 U14.P$2 v15.34,18.64 | 33.17,6.93 36.6,6.93 | I2.1 35.61,2.3 36.78,3.47 v36.78,6.93 36.78,16.65 v35.05,18.38 | 21.31,27.68 v22.99,26
  Bottom 0.152: 17.8,18.3 | 27.35,8.75 27.4,8.8 | 26.66,22.61 v26.69,22.65 | 23.71,20.46 R2.2
  Bottom 0.254: J3.P$4 31.07,10.4 v31.6,9.87 31.6,8.02 | 19.76,16.34 v19.72,16.38 | 25.73,15.23 25.34,15.62
  Bottom 0.406: 17.8,18.3 19.76,16.34 v21.48,14.62 24.66,11.45 | 17.8,18.3 17.47,18.63 v15.34,18.63 | v36.78,6.93 32.69,6.93 31.6,8.02 30.38,9.24 26.87,9.24 24.66,11.45 | v35.05,18.38 30.95,18.38 v29.88,19.45 29.31,20.03 v26.69,22.65 25.14,21.09 R1.2 24.21,20.56 R2.2 | 26.21,14.75 25.34,15.62 20.32,20.64 v20.32,21.14 20.32,23.33 v22.99,26 | 26.21,14.75 v26.77,14.19 | 24.66,11.45 24.66,12.99 26.21,14.55 26.21,14.75
!CS-ADT7301  (via drill 0.33)
  Top 0.152: U21.P$11 14.96,26.94 14.1,26.08 v14.1,25.29 | U15.P$5 6.45,15.08 6.78,14.75 v12.04,14.75
  Bottom 0.152: v14.1,25.29 14.1,17.19 12.04,15.13 v12.04,14.75
!CS-ADXL362  (via drill 0.33)
  Top 0.152: U21.P$1 v21.31,36.21 | v30,38.45 31.67,38.45 33.62,40.39 U10.P$8
  Bottom 0.152: v21.31,36.21 22.33,37.23 28.4,37.23 v30,38.45
!CS-H3LIS331DLTR  (via drill 0.33)
  Top 0.152: U21.P$2 v20.04,37.2 | v24.33,38.5 25.07,39.23 25.07,41.39 24.81,41.65 U2.P$8
  Bottom 0.152: v24.33,38.5 21.33,38.5 v20.04,37.2
!CS-LIS3DH
  Top 0.152: U21.P$7 13.69,35.63 13.46,35.86 11.05,35.86 9.42,37.48 9.42,43.12 8.74,43.81 7.75,43.81 7.48,44.08 U9.P$8
!CS-LPS331
  Top 0.152: U21.P$10 13.69,27.35 12.34,26 7.45,26 U4.P$8
!CS-LS3GD20
  Top 0.152: U21.P$9 11.51,29.09 8.3,32.3 8.3,34.13 7.45,34.98 U3.P$5
!CS-LSM9D30-G  (via drill 0.33)
  Top 0.152: U21.P$3 v18.77,49.55 | U17.P$19 17.52,57.09 v18.77,55.84
  Bottom 0.152: v18.77,49.55 v18.77,55.84
!CS-LSM9DS0-XM  (via drill 0.33)
  Top 0.152: U21.P$4 v17.5,49.55 | 16.16,56.58 U17.P$20 16.75,56.59 v17.5,55.84
  Bottom 0.152: v17.5,49.55 v17.5,55.84
!CS-LSM303  (via drill 0.33)
  Top 0.152: v11.45,49.55 11.45,37.74 12.32,36.87 13.99,36.87 14.91,35.96 14.91,34.49 U21.P$6 | v11.45,56.91 10.41,57.95 9.42,57.95 8.88,58.5 U6.P$8
  Bottom 0.152: v11.45,49.55 v11.45,56.91
!CS-MAX21000
  Top 0.152: U21.P$5 16.23,37.13 15.37,37.99 15.37,41.04 14.77,41.63 U19.P$8
ANALOG-OUT-STLM20
  Top 0.152: U11.P$58 31.7,12.09 R10.2 32.75,10.81 U8.P$3
GND  (via drill 0.33)  (118 unrouted)
  Top 0.152: U11.P$55 27.78,13.86 | 19.67,14.94 U11.P$39 17.39,12.64 14.96,12.64 13.94,11.62 C44.2 | v2.08,44.21 2.98,45.11 C26.1 | v2.08,26.23 2.98,27.13 C14.1 | v2.08,38.01 2.98,37.12 C12.1 | v2.34,58.69 2.94,59.3 C20.1 | U11.P$12 27.43,24.1 27.43,25.44 27.48,25.49 28,25.49 C38.1 | U8.P$2 33.42,10.87 | 32.29,22.22 C39.1 | 31.41,21.32 C37.1 31.52,21.25 | C2.2 | C41.2 10.18,12.39 | 10.18,12.39 C42.1 | C11.2 13.77,47.33 v13.21,47.9 | C8.2 23.81,47.33 v23.24,47.9 23.81,48.46 C6.2 | 10.18,12.39 10.18,12.97 10.77,13.55 12.6,13.55 14.73,15.69 17.61,15.69 U11.P$35 | v19.89,61.1 18.96,60.18 C27.2 | v31.95,45.53 32.04,45.53 C28.2
  Top 0.254: U11.P$3 30.64,20.95 31.24,20.95 C37.1 | 31.52,21.25 C39.1
  Bottom 0.152: v2.08,44.21 2.08,43.6 C47.P$2 C13.P$2 2.08,38.63 v2.08,38.01 | C45.P$2 2.08,25.62 v2.08,26.23 | C46.P$2 2.34,57.79 v2.34,58.69 | C25.P$2 20.47,61.1 v19.89,61.1 | C54.P$2 12.29,47.9 v13.21,47.9 | C7.P$2 22.32,47.9 v23.24,47.9 | C19.P$2 30.82,46.64 30.85,46.64 v31.95,45.53
IND-LED-1
  Top 0.152: U11.P$45 20.62,11.63 LED2.A
IND-LED-2
  Top 0.152: U11.P$46 21.87,12.17 LED3.A
IND-LED-3
  Top 0.152: U11.P$47 22.2,11.79 22.2,11.32 23.06,10.46 LED4.A
IND-LED-4
  Top 0.152: U11.P$48 24.38,10.25 LED5.A
INT1-MAG3110
  Top 0.152: U11.P$1 31.4,19.42 32.92,19.42 37.62,24.12 37.62,58.82 37.03,59.4 34.47,59.4 34.09,59.78 U1.P$9
INT1-MPL311
  Top 0.152: U11.P$4 33.91,24.92 33.91,31.51 32.99,32.43 U5.P$6
INT2-ADXL362
  Top 0.152: U11.P$5 32.53,24.25 32.54,24.25 33.04,24.76 33.04,31.04 30.78,33.31 30.78,36.48 34.36,40.07 U10.P$9
INT2-H3LIS331
  Top 0.152: U11.P$9 29.59,24.13 29.59,29.09 25.93,32.74 25.93,42.18 25.84,42.27 U2.P$9
INT2-L3GD  (via drill 0.33, 0.33 pad 0.25)
  Top 0.152: U11.P$15 26.26,25.05 26.26,26.92 v22.88,30.29 | v8.96,36.12 U3.P$6
  Bottom 0.152: v22.88,30.29 22.83,30.37 11.43,30.37 8.96,32.83 v8.96,36.12
INT2-LIS3DH  (via drill 0.33)
  Top 0.152: 8.39,44.61 U9.P$9 9.42,44.61 10.44,43.59 v10.44,38.24 | U11.P$14 26.67,24.75 26.67,27.85 v22.88,31.64
  Bottom 0.152: v22.88,31.64 22.81,31.72 12.06,31.72 10.44,33.34 v10.44,38.24
INT2-LPS331  (via drill 0.33, 0.33 pad 0.15)
  Top 0.152: v9.04,26.63 U4.P$9 | U11.P$16 25.66,25.98 v25.02,26.63
  Bottom 0.152: v25.02,26.63 v9.04,26.63
INT2-LSM303  (via drill 0.33)
  Top 0.152: 10.01,58.87 U6.P$9 11.45,58.87 v13.41,56.91 | U11.P$10 28.73,23.98 28.73,28.49 22.88,34.33 22.88,38.24 20.04,41.09 20.04,48.02 v19.71,48.35
  Bottom 0.152: v13.41,56.91 13.49,56.84 13.49,50.05 14.78,48.76 19.3,48.76 v19.71,48.35
INT2-MAX21000  (via drill 0.33)
  Top 0.152: v16.03,38.62 16.03,42.15 15.9,42.27 U19.P$9 | U11.P$13 27.07,24.45 27.07,28.79 v22.88,32.99
  Bottom 0.152: v22.88,32.99 17.3,32.99 16.86,33.42 16.86,37.79 v16.03,38.62
LSM9D-DRGY-G  (via drill 0.33)
  Top 0.152: U11.P$8 30.45,24.29 30.45,29.58 26.95,33.08 v26.95,49.17 | U17.P$12 24.9,57.09 26.95,55.03 v26.95,52.85
  Bottom 0.152: v26.95,49.17 v26.95,52.85
LSM9D-INT1-XM  (via drill 0.33)
  Top 0.152: U11.P$7 31.32,24.45 31.32,30.06 27.96,33.42 v27.96,48.4 | U17.P$13 26.33,57.56 27.96,55.92 v27.96,52.09
  Bottom 0.152: v27.96,48.4 v27.96,52.09
LSM9D-INT2-XM  (via drill 0.33)
  Top 0.152: v28.98,49.17 28.98,33.75 32.18,30.55 32.18,24.6 U11.P$6 | v28.98,52.85 28.98,56.76 26.95,58.79 19.28,58.79 18.88,58.4 U17.P$14
  Bottom 0.152: v28.98,49.17 v28.98,52.85
MISO-A
  Top 0.152: U11.P$28 17.06,23.19 U14.P$9
MISO-B  (via drill 0.33, 0.41)
  Top 0.152: U6.P$7 8.38,55.87 7.59,55.08 v7.59,55.06 7.59,55.09 U17.P$23 U17.P$22 | U2.P$7 24.31,40.76 v24.43,40.68 | U15.P$6 7.4,17.07 v7.59,17.24 | U4.P$7 6.95,25.53 7.59,24.88 v7.59,23.21 7.61,23.19 U14.P$12 | U3.P$4 6.95,34.31 7.52,33.75 v7.59,33.75 | U19.P$7 14.27,40.78 v14.37,40.68 | U10.P$7 33.12,40.99 32.82,40.68 v31.77,40.68 | U9.P$7 6.95,43.69 v7.16,43.48
  Bottom 0.152: 7.59,40.68 v7.59,33.75 v7.59,23.21 v7.59,17.24 7.59,16.8 7.4,16.6 7.56,16.6 R6.1 | 7.59,40.68 7.59,43.35 | 7.59,43.35 v7.59,55.06 | v31.77,40.68 v24.43,40.68 v14.37,40.68 7.59,40.68 | v7.16,43.48 7.47,43.48 7.59,43.35
MOSI-A
  Top 0.152: U11.P$29 17.01,22.54 U14.P$8
MOSI-B  (via drill 0.33)
  Top 0.152: U6.P$6 7.87,58.24 7.87,56.66 6.45,55.26 v6.45,54.02 6.77,54.06 14.8,54.06 15.32,54.59 U17.P$24 | v8.53,39.56 v6.45,39.56 | U19.P$6 13.77,39.68 v13.79,39.56 | U2.P$6 23.81,39.68 v23.82,39.56 | U4.P$6 v6.45,22.55 6.46,22.54 U14.P$13 | U3.P$3 v6.45,33.04 | v30.73,39.56 30.73,41.04 31.44,41.75 32.37,41.75 U10.P$6 | v6.45,19.45 U15.P$2 | U9.P$6 v6.45,45.36 | U4.P$6
  Bottom 0.152: 6.45,41.95 v6.45,39.56 | v6.45,39.56 v6.45,33.04 v6.45,22.55 v6.45,19.45 R4.1 | v6.45,39.56 v6.45,45.36 v6.45,54.02 | v30.73,39.56 v23.82,39.56 v13.79,39.56 v8.53,39.56
N$1
  Top 0.152: C1.1 35.48,63.08 34.61,62.2 U1.P$1
N$2
  Bottom 0.61: J1.P$1 11.47,8.89 10.55,7.98 S1.2
N$3
  Top 0.152: C4.1 32.15,63.36 32.38,63.14 33.07,63.14 33.29,62.92 U1.P$4
N$4
  Top 0.152: C10.1 4.14,37.78 4.8,37.12 U3.P$14
N$5
  Top 0.152: C17.1 U5.P$2
N$6
  Top 0.152: U6.P$15 C18.1
N$7
  Top 0.152: C21.2 5.3,60.37 U6.P$2
N$8
  Top 0.152: U17.P$7 20.89,54.59 21.03,54.45 21.78,54.45 C48.1
N$9
  Top 0.152: R10.1 33.83,12.94 C24.2
N$10
  Top 0.152: U11.P$38 17.93,13.88 15.75,13.88 | R17.1 15.75,14.46 15.75,13.88 | 15.75,13.88 15.75,13.34 C30.2
N$11
  Top 0.152: X1.P$2 11.93,10.66 C42.2 12.19,12.39 15.01,15.21 17.83,15.21 U11.P$36
N$12
  Top 0.152: U11.P$34 17.38,16.17 14.45,16.17 12.32,14.04 9.37,14.04 8.49,13.16 C41.1 8.49,10.61 X1.P$1
N$13
  Top 0.152: 3.2,9.97 I1.2
  Top 0.254: U7.7 3.74,5.55 3.2,6.09 3.2,9.97
N$14
  Top 0.152: R16.2 15.35,9.78 C43.1 16.43,7.15 X2.P$1
N$15
  Top 0.152: U6.P$3 5.93,59.87 5.35,59.3 C21.1
N$16
  Top 0.152: U11.P$40 20.04,14.57 17.55,12.13 15.37,12.13 14.6,11.37 14.6,10.07 14.38,9.85 C44.1 X2.P$3 13.94,8.46
N$17
  Top 0.152: 20.39,14.23 U11.P$41 17.71,11.55 15.62,11.55 15.3,11.23 R16.1
N$18
  Top 0.152: LED5.C R15.2
N$21
  Top 0.152: C49.2 22.93,55.03 20.45,55.03 20.39,55.09 U17.P$8
N$22
  Top 0.152: U17.P$9 21.78,55.59 C49.1
N$23
  Top 0.254: R9.2 4.24,6.51
  Top 0.406: 4.24,6.51 U7.6
N$24
  Bottom 0.152: TP6.P$1 R5.2
N$26
  Bottom 0.152: TP5.P$1 R8.2
N$27
  Top 0.254: LED1.A 18.28,3.81 R7.1
N$29
  Top 0.152: LED4.C R14.2
N$31
  Top 0.152: LED3.C R13.2
N$32
  Bottom 0.152: TP1.P$1 R3.2
N$33
  Bottom 0.152: TP2.P$1 R4.2
N$34
  Bottom 0.152: R6.2 TP3.P$1
N$35
  Top 0.152: LED2.C R12.2
N$36
  Top 0.254: U12.7 28.65,4.79 29.46,5.6 I2.2
N$37
  Top 0.152: U12.6
  Top 0.254: U12.6 R11.2
POWER-IN  (via drill 0.46)
  Top 0.152: 1.57,3.17 C50.1 | 26.29,5.32 U12.1
  Top 0.254: U12.1 26.25,5.54 26.41,5.71 | R7.2 19.25,2.93 19.25,1.44
  Top 0.406: U7.8 2.93,4.93 2.79,4.79 2.79,3.17 | 2.79,3.17 2.93,3.03 U7.1 3.24,1.86 | 2.79,3.17 1.57,3.17 | U12.8 28.15,5.54 27.99,5.71 26.41,5.71 | C53.1 26.29,5.32 | 25.36,5.29 U12.1
  Top 0.61: 3.24,1.86 3.66,1.44 v8.79,1.44 19.25,1.44 23.52,1.44 24.92,2.84 24.92,4.84 25.36,5.29
  Bottom 0.61: S1.1 9.05,5.67 8.79,5.4 v8.79,1.44
SCL-0  (via drill 0.33)
  Top 0.152: U1.P$7 33.29,54.59 v33.71,54.17 34.52,53.36 U22.P$10 | v35.49,35.13 U5.P$8 | U11.P$23 21.11,22.67 21.51,22.67 22.02,23.18 22.63,23.18 v23.42,22.39
  Bottom 0.152: 34.13,36.72 R5.1 33.97,36.65 | 33.97,36.65 33.74,36.88 33.74,54.14 v33.71,54.17 | 33.97,36.65 v35.49,35.13 35.49,34.47 v23.42,22.39 24.12,21.69 R1.1
SCLK-A
  Top 0.152: 17.94,20.9 U11.P$30 16.95,21.89 U14.P$7
SCLK-B  (via drill 0.33, 0.41)
  Top 0.152: U10.P$4 v30.55,42.78 | U9.P$4 4.77,45.11 v4.37,45.51 | U17.P$21 v9.28,56.09 | U15.P$4 5.5,17.12 v5.31,17.24 | v5.31,42.78 v8.53,42.78 | U19.P$4 v14.02,42.78 | U2.P$4 v24.05,42.78 | U3.P$2 5.95,34.31 5.38,33.75 v5.31,33.75 | U6.P$4 6.58,59.38 v6.37,59.17 | U4.P$4 5.73,27.14 4.7,27.14 v4.57,27.27 | v5.31,21.89 U14.P$14
  Bottom 0.152: 5.31,27.14 v5.31,21.89 v5.31,17.24 R3.1 | 5.31,27.14 v5.31,33.75 v5.31,42.78 5.31,45.1 | v8.53,42.78 v14.02,42.78 v24.05,42.78 v30.55,42.78 | 5.31,45.1 5.31,55.62 5.76,56.09 | 5.76,56.09 5.76,58.56 v6.37,59.17 | v4.37,45.51 4.77,45.1 5.31,45.1 | v9.28,56.09 5.76,56.09 | v4.57,27.27 4.7,27.14 5.31,27.14
SD-CARD-INSERT  (via drill 0.33)
  Top 0.152: U11.P$60 30.94,14.26 v34.69,14.26
  Bottom 0.152: v34.69,14.26 35.13,13.83 J3.P$8
SD-CS  (via drill 0.33)
  Top 0.152: U11.P$62 31.14,15.47 v31.29,15.46
  Bottom 0.152: J3.P$2 28.87,12.48 31.29,14.9 v31.29,15.46
SD-MISO  (via drill 0.33)
  Top 0.152: U11.P$63 31.27,16.05 v33.81,16.05
  Bottom 0.152: J3.P$7 34.37,11.8 33.78,12.39 33.78,16.03 v33.81,16.05
SD-MOSI  (via drill 0.33)
  Top 0.152: U11.P$64 31.37,16.66 v31.9,16.66
  Bottom 0.152: J3.P$3 29.97,12.06 31.9,13.99 v31.9,16.66
SD-SCLK  (via drill 0.33)
  Top 0.152: U11.P$61 31.04,14.87 v32.61,14.87
  Bottom 0.152: J3.P$5 32.17,11.64 32.61,12.08 v32.61,14.87
SDA-0  (via drill 0.33)
  Top 0.152: U1.P$6 32.89,54.59 v32.48,54.17 31.72,53.43 U22.P$1 | v34.24,35.13 34.24,34.84 U5.P$7 | U11.P$24 20.96,22.11 21.94,22.11 v22.09,22.26
  Bottom 0.152: 33.27,35.93 R8.1 33.16,35.95 33.29,36.08 | 34.24,34.36 34.24,34.38 | 34.24,34.38 v34.24,35.13 33.29,36.08 | 33.29,36.08 32.5,36.87 32.5,54.14 v32.48,54.17 | 34.24,34.38 v22.09,22.26 23.17,21.18 23.2,21.18 R2.1
SPI-ADDR0
  Top 0.152: U11.P$17 20.04,27.99 U21.P$15
SPI-ADDR1
  Top 0.152: U11.P$18 19.21,28.11 18.92,28.11 18.77,28.26 U21.P$14
SPI-ADDR2
  Top 0.152: U11.P$19 18.99,27.63 17.88,27.63 17.5,28.01 U21.P$13
SPI-ADDR3
  Top 0.152: U11.P$20 18.76,27.14 16.71,27.14 16.23,27.63 U21.P$12
SPI-ENABLE  (via drill 0.33)
  Top 0.152: 17.61,20.51 U11.P$31 17.64,20.49 v15.64,20.49 | v15.64,23.84 15.54,23.84 U14.P$10
  Bottom 0.152: v15.64,20.49 v15.64,23.84
SWCLK  (via drill 0.33)
  Top 0.152: U11.P$52 27.07,12.47 27.07,10.76 29.01,8.83 v29.01,8.14
  Bottom 0.152: J4.P$1 v29.01,8.14
SWDIO  (via drill 0.33)
  Top 0.152: U11.P$51 26.72,12.12 26.72,10.51 27.99,9.24 v27.99,8.14
  Bottom 0.152: J4.P$2 27.99,6.7 v27.99,8.14
SWO  (via drill 0.33)
  Top 0.152: U11.P$49 25.96,11.47 25.96,10.97 25.96,9.76 v25.96,8.14
  Bottom 0.152: J4.P$4 25.96,6.73 v25.96,8.14
TDI  (via drill 0.33)
  Top 0.152: U11.P$50 26.34,11.79 26.34,10.23 26.97,9.59 v26.97,8.14
  Bottom 0.152: J4.P$3 26.97,6.72 v26.97,8.14
U6RX  (via drill 0.33)
  Top 0.152: U11.P$43 18.82,11.24 v18.82,10.81
  Bottom 0.152: v18.82,10.81 18.83,10.78 J2.P$1 18.83,8.28 17.3,6.75 TP8.P$1 17.3,7.41
U6TX  (via drill 0.33)
  Top 0.152: U11.P$44 19.84,11.55 v19.84,10.81
  Bottom 0.152: v19.84,10.81 J2.P$2 19.83,8.28 21.36,6.75 TP7.P$1